# EAGLE board led_strip_II (EAGLE 5.11)
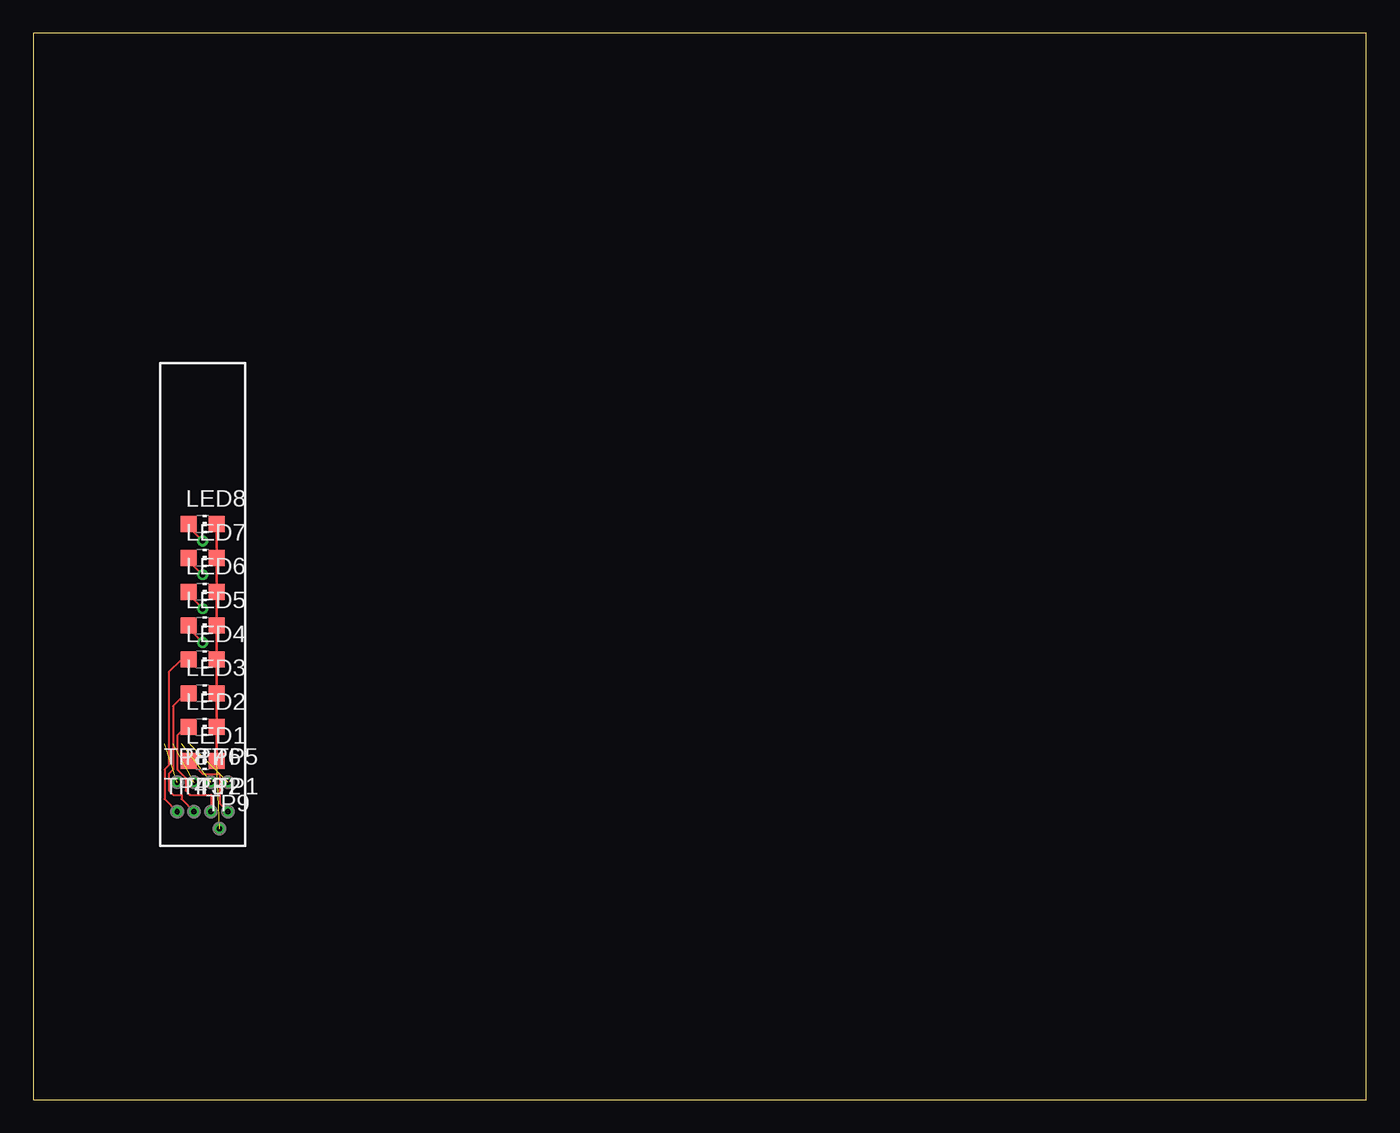
[diagram p0: board, top side]
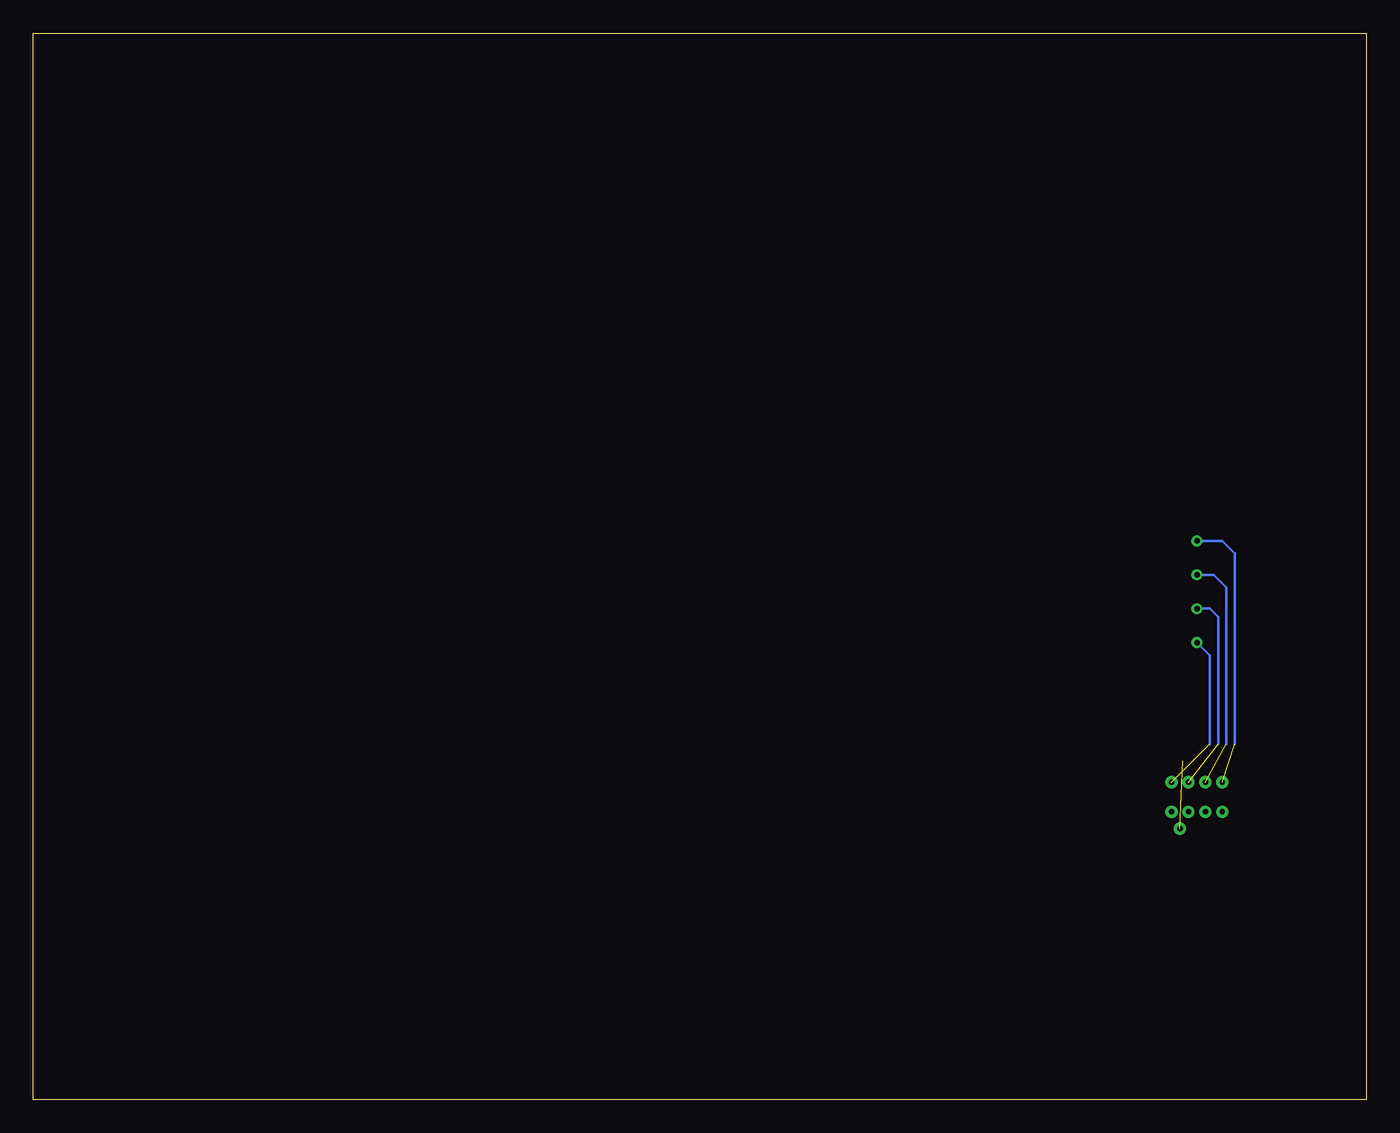
[diagram p1: board, bottom side, seen from below]

Size 100 x 80 mm. Coordinates in mm from the lower left corner, seen from the top.
Outline: 0,0 100,0 100,80 0,80 0,0
Copper layers (1*16): Top 0.035mm / dielectric 1.5mm / Bottom 0.035mm
Design rules "default *": minimum track width 6mil, minimum drill 15mil, track to track 6mil, track to pad 6mil, pad to pad 8mil, via to via 8mil, smd to smd 6mil, copper to edge 40mil, drill to drill 8mil, minimum pad ring 10mil, minimum via ring 8mil, stop-mask expansion 4mil, vias tented up to drill 0mil, thermal gap 10mil

## Footprints (pad centres in the part's own frame; a part is rotated, then mirrored left to right if it is on the bottom)
CHIP-LED0805 = smd 1.2 x 1.2: A 0,-1.05; C 0,1.05
P1-16 = drill 0.406 pad 0.508 round: TP 0,0

## Placement (x,y rotation side)
LED1  [CHIP-LED0805]  12.7,25.4 270 top
LED2  [CHIP-LED0805]  12.7,27.94 270 top
LED3  [CHIP-LED0805]  12.7,30.48 270 top
LED4  [CHIP-LED0805]  12.7,33.02 270 top
LED5  [CHIP-LED0805]  12.7,35.56 270 top
LED6  [CHIP-LED0805]  12.7,38.1 270 top
LED7  [CHIP-LED0805]  12.7,40.64 270 top
LED8  [CHIP-LED0805]  12.7,43.18 270 top
TP1  TPPAD1-16  [P1-16]  14.61,21.59 0 top
TP2  TPPAD1-16  [P1-16]  13.34,21.59 0 top
TP3  TPPAD1-16  [P1-16]  12.06,21.59 0 top
TP4  TPPAD1-16  [P1-16]  10.79,21.59 0 top
TP5  TPPAD1-16  [P1-16]  14.61,23.81 0 top
TP6  TPPAD1-16  [P1-16]  13.34,23.81 0 top
TP7  TPPAD1-16  [P1-16]  12.06,23.81 0 top
TP8  TPPAD1-16  [P1-16]  10.79,23.81 0 top
TP9  TPPAD1-16  [P1-16]  13.97,20.32 0 top

## Library data of the parts
LED1-LED8 = led
TP1-TP9 = CyberRailGuru

## Nets
GND: LED1.C LED2.C LED3.C LED4.C LED5.C LED6.C LED7.C LED8.C TP9.TP
NET1: LED1.A TP1.TP
NET2: LED2.A TP2.TP
NET3: LED3.A TP3.TP
NET4: LED4.A TP4.TP
NET5: LED5.A TP5.TP
NET6: LED6.A TP6.TP
NET7: LED7.A TP7.TP
NET8: LED8.A TP8.TP

## Tracks (layer width: path | path; a pad name or v marks a point on that pad's centre or on a via)
GND  (1 unrouted)
  Top 0.203: LED8.C LED7.C LED6.C LED5.C LED4.C LED3.C LED2.C LED1.C
NET1
  Top 0.152: 11.75,25.4 12.7,24.45 13.97,24.45 13.97,22.23 TP1.TP
  Top 0.203: LED1.A 11.75,25.4
NET2
  Top 0.152: 11.43,27.94 10.79,27.3 10.79,24.77 11.43,24.13 11.43,23.18 11.75,22.86 13.34,22.86 TP2.TP
  Top 0.203: LED2.A 11.43,27.94
NET3
  Top 0.152: 11.43,30.48 10.48,29.53 10.48,24.77 10.16,24.45 10.16,23.18 10.48,22.86 11.11,22.86 11.11,22.54 TP3.TP
  Top 0.203: LED3.A 11.43,30.48
NET4
  Top 0.152: 11.11,33.02 10.16,32.07 10.16,25.08 9.84,24.77 9.84,22.54 TP4.TP
  Top 0.203: LED4.A 11.11,33.02
NET5  (via drill 0.41)  (1 unrouted)
  Top 0.203: LED5.A 11.65,35.34 v12.7,34.29
  Bottom 0.203: v12.7,34.29 11.75,33.34 11.75,26.67
NET6  (via drill 0.41)  (1 unrouted)
  Top 0.203: LED6.A 11.65,37.88 v12.7,36.83
  Bottom 0.203: v12.7,36.83 11.75,36.83 11.11,36.2 11.11,26.67
NET7  (via drill 0.41)  (1 unrouted)
  Top 0.203: LED7.A 11.65,40.42 v12.7,39.37
  Bottom 0.203: v12.7,39.37 11.43,39.37 10.48,38.42 10.48,26.67
NET8  (via drill 0.41)  (1 unrouted)
  Top 0.203: LED8.A 11.65,42.96 v12.7,41.91
  Bottom 0.203: v12.7,41.91 10.79,41.91 9.84,40.96 9.84,26.67